# Altium PCB 24.067.PcbDoc
Units mm, origin at the board's own origin, x right, y up, seen from the top; angles counter-clockwise.
Board outline 64 x 52 mm, 2 copper layers (Top Layer, Bottom Layer); 5 components, 16 nets, 53 pads, 0 vias.
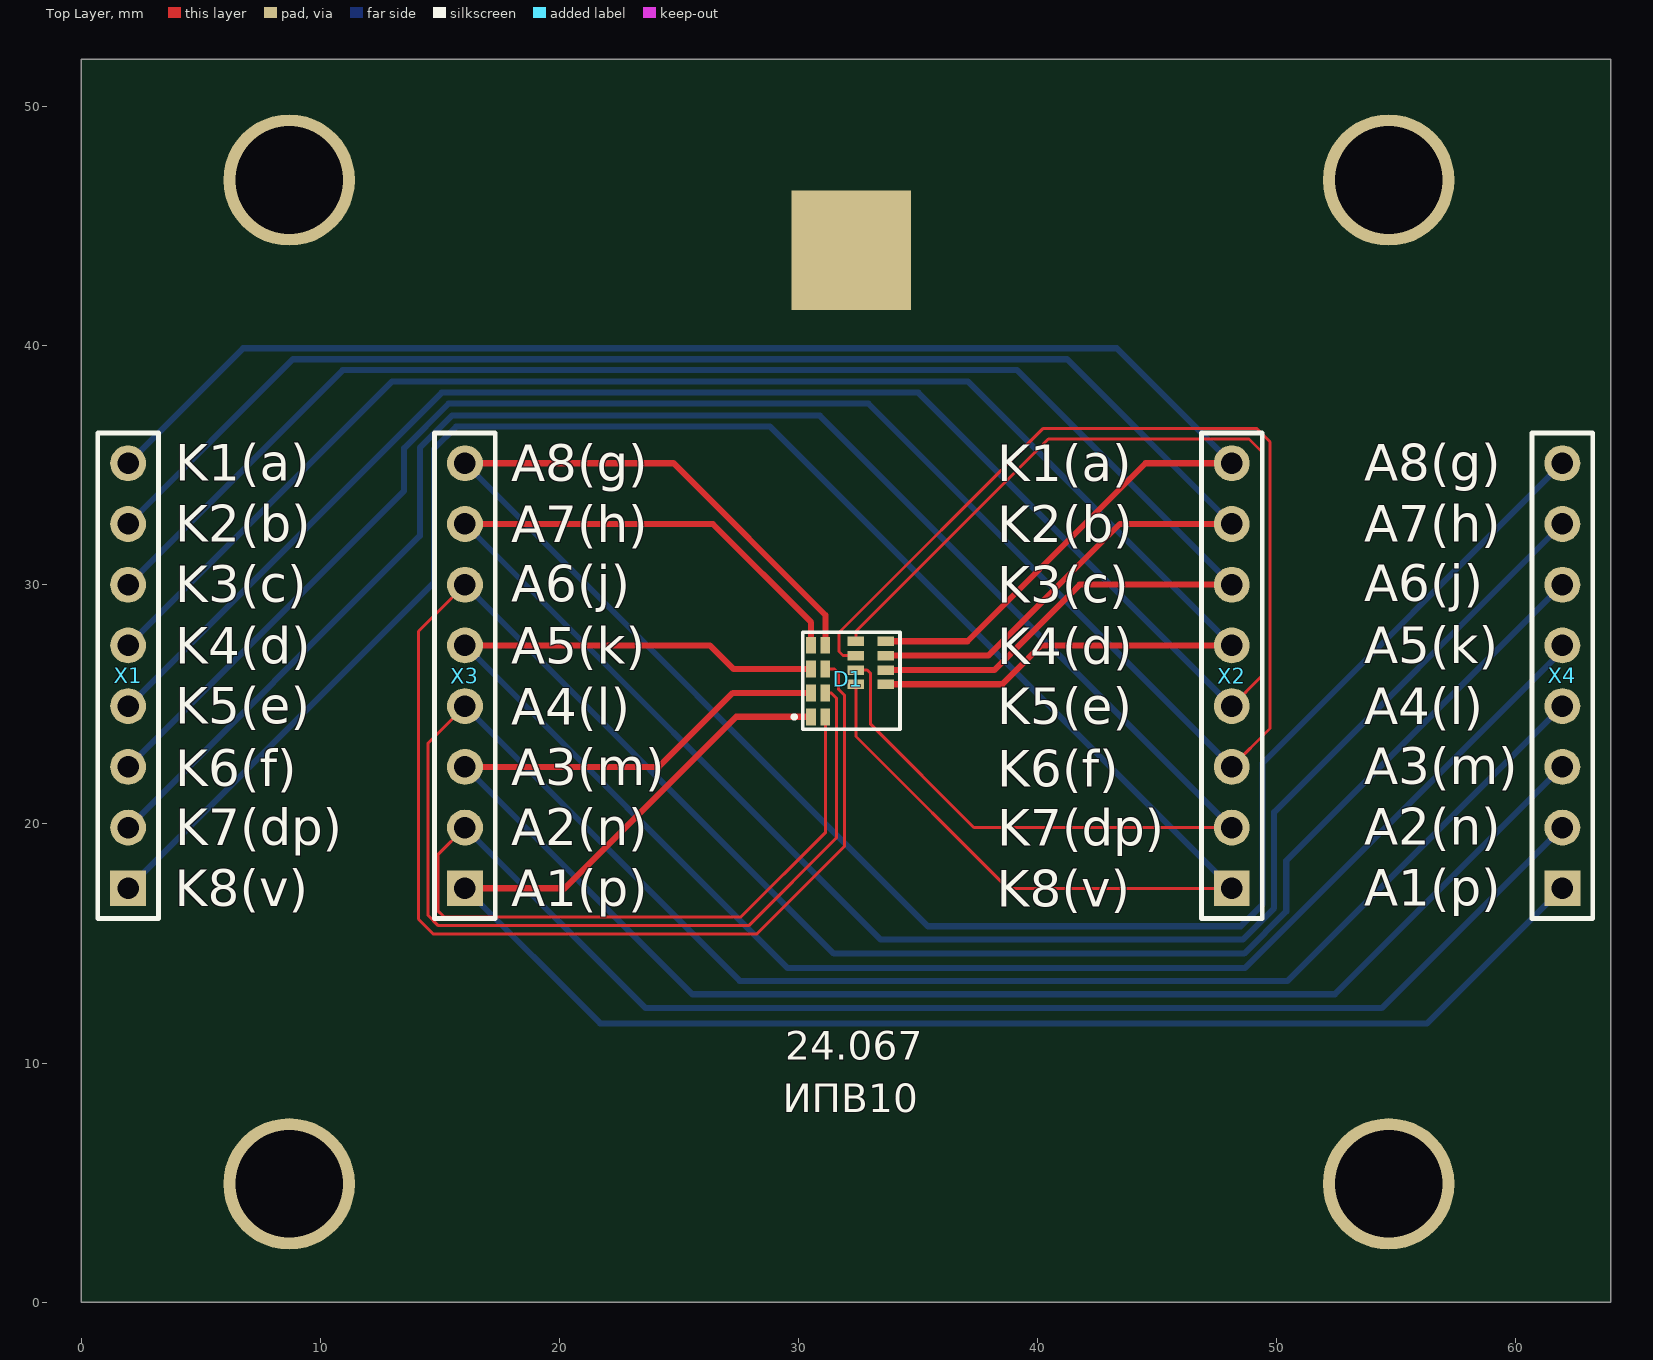
[diagram p0: Top Layer view]
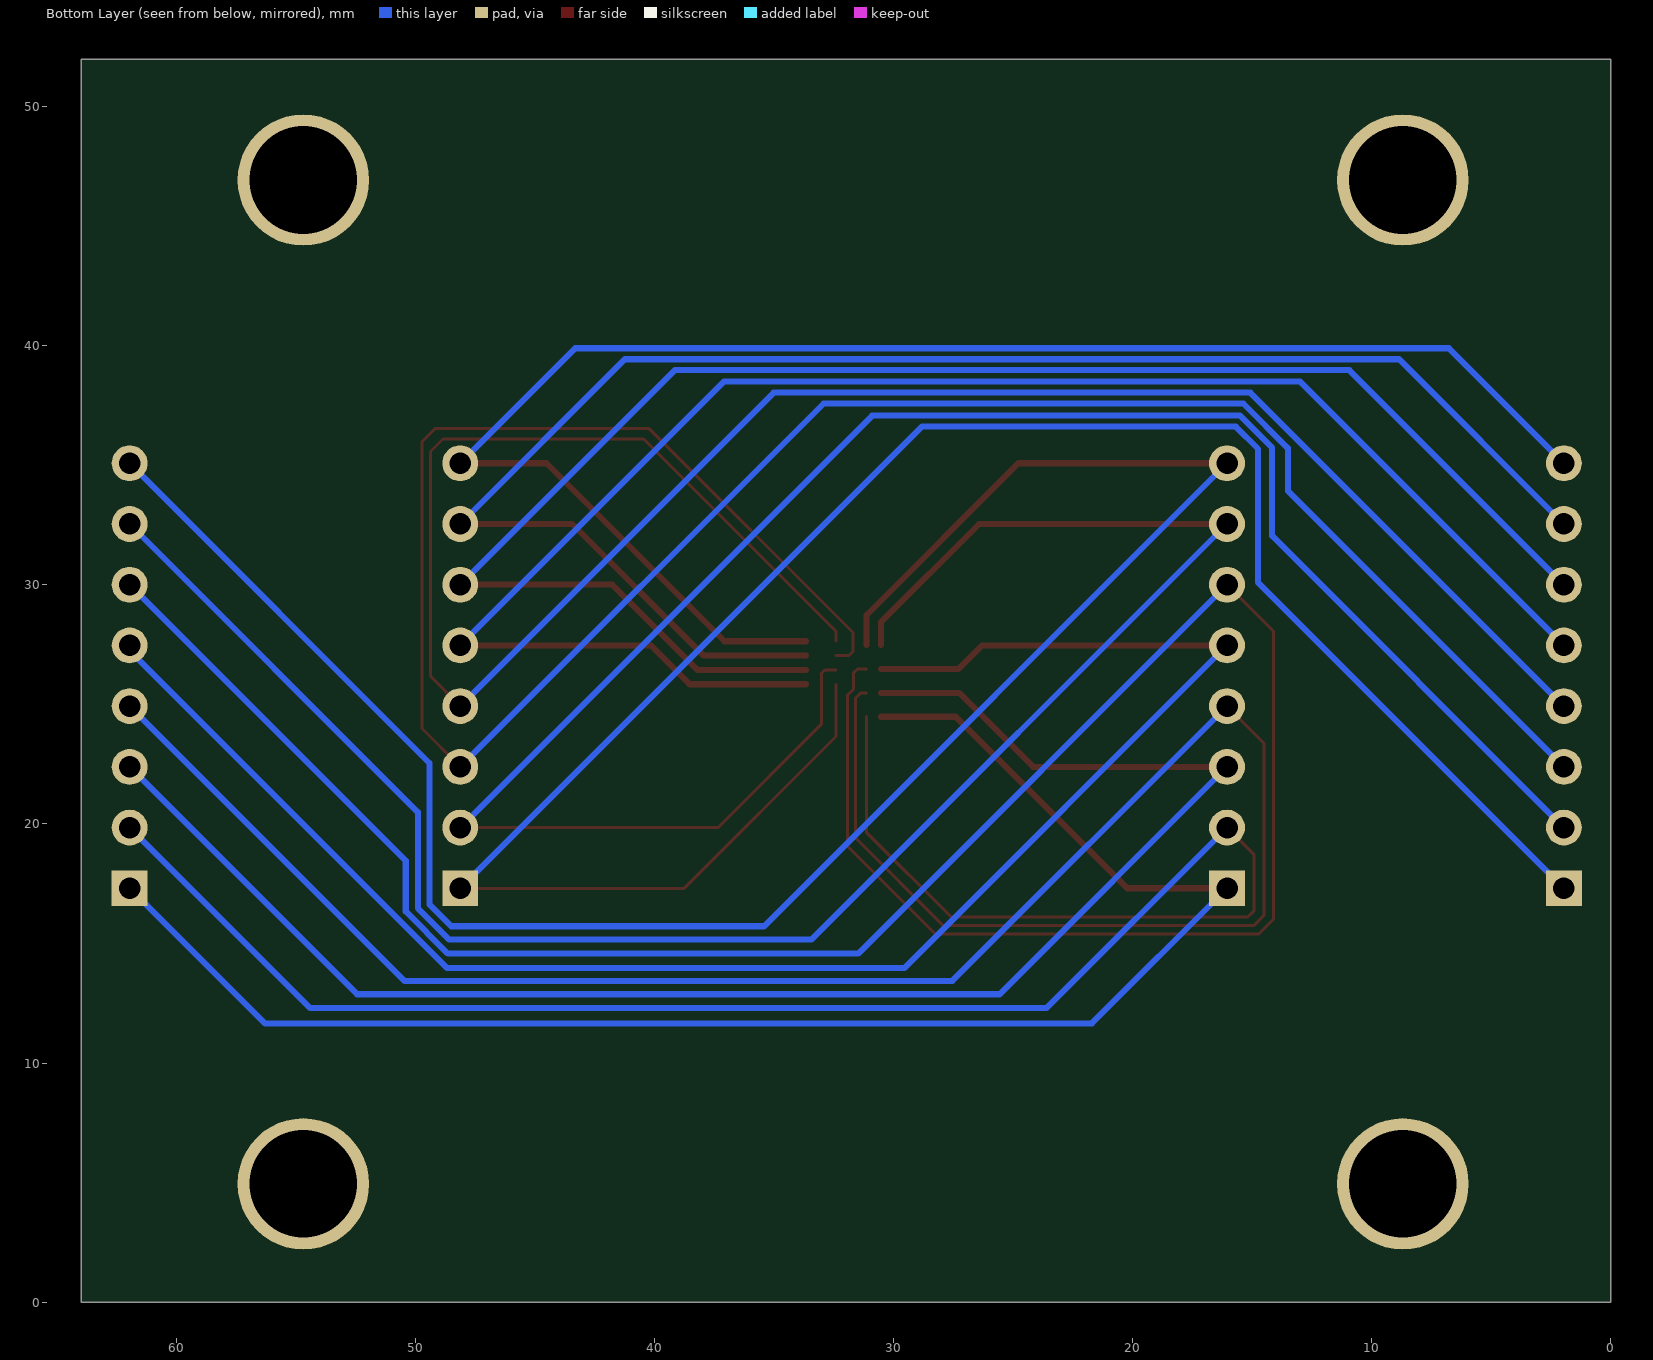
[diagram p1: Bottom Layer view, seen from below]

## Layer stack, top to bottom
Top Solder: solder mask 0.0102, Solder Resist, Dk 3.5
Top Layer: signal copper 0.0356
Dielectric 1: dielectric 0.32, FR-4, Dk 4.8
Bottom Layer: signal copper 0.0356
Bottom Solder: solder mask 0.0102, Solder Resist, Dk 3.5

## Board outline
64,0 64,52 0,52 0,0

## Design rules (kind name [scope] priority, off if disabled: settings)
Clearance [All] p1: gap=0.254 ignorepadtopadclearanceinfootprint=FALSE except(0: Arc-Hole Track-Hole SMDPad-Hole THPad-Hole Via-Hole Fill-Hole Poly-Hole Region-Hole Text-Hole; 0.2: Arc-Arc Arc-Track Arc-SMDPad Arc-THPad Track-Track Track-SMDPad Track-THPad SMDPad-SMDPad SMDPad-THPad THPad-THPad)
PolygonConnect [All] p1: connectstyle=Relief reliefconductorwidth=0.254 reliefentries=4 polygonreliefangle="90 Angle" airgapwidth=0.254
RoutingVias [All] p1: holewidth=0.711 width=1.27 viastyle="Through Hole" minholewidth=0.711 minwidth=1.27 maxholewidth=0.711 maxwidth=1.27
SolderMaskExpansion [All] p1: expansion=0.102
Width [All] p1: maxlimit=0.254 minlimit=0.125 preferedwidth=0.254
30 further rules are at their usual default settings.

## Components (designator, comment, footprint, x,y, rotation, side; value= is the part's Value field where it differs from the comment)
D1 "LED_8x8" LED_8x8 30.535,24.481 r0 top
X1 "Header 8" HDR1X8 1.968,17.311 r90 top
X2 "Header 8" HDR1X8 48.14,17.311 r90 top
X3 "Header 8" HDR1X8 16.06,17.311 r90 top
X4 "Header 8" HDR1X8 61.968,17.311 r90 top

## Footprints (in the part's own frame and the unit in brackets; to place one, negate y for a bottom-side part, rotate by r counter-clockwise, add the part's x,y. Pads: shape width x height; smd on the part's side, far side on the other; paste and mask are expansions set on the pad)
HDR1X8 [mm] "Connector; Header; 8 Position"
  rect 1.5x1.5 hole 0.9: 1(0,0)
  round 1.5 hole 0.9: 2(2.54,0) 3(5.08,0) 4(7.62,0) 5(10.16,0) 6(12.7,0) 7(15.24,0) 8(17.78,0)
  silkscreen extent -1.27,-1.27 19.05,1.27
LED_8x8 [mm] "24.067"
  rect 0.4x0.7 smd: 1(0,0) 2(0.6,0) 3(0,1) 4(0.6,1) 5(0,2) 6(0.6,2) 7(0,3) 8(0.6,3)
  rect 0.7x0.4 smd: 9(3.125,3.159) 10(3.125,2.559) 11(3.125,1.959) 12(3.125,1.359) 13(1.875,3.159) 14(1.875,2.559) 15(1.875,1.959) 16(1.875,1.359)
  silkscreen extent -0.72,-0.52 3.72,3.55

## Part data
X1 X2 X3 X4: "Header, 8-Pin", LatestRevisionDate=17-Jul-2002, LatestRevisionNote="Re-released for DXP Platform.", Publisher="Altium Limited"

## Free pads (board coordinates)
  rect 5x5 smd: 0(32.222,44.007)
  round 5.5 hole 4.5: 1(8.701,4.942) 1(8.701,46.942) 1(54.701,4.942) 1(54.701,46.942)

## Nets (pads, with @x,y where several pads share a name; then routed paths per layer and width w, separated by ;. In a path a pad name is that pad's centre, name@x,y a point inside that pad or via, vN(x,y) a via of type N, cw(c..) or ccw(c..) an arc to the next point about the centre after c; other vN are vias at no path point)
A1: D1.1 X3.1 X4.1 | length 68
  Top Layer w0.254: X3.1 20.233,17.311 27.409,24.487 D1.1@30.543,24.487
  Bottom Layer w0.254: X3.1 21.713,11.659 56.315,11.659 X4.1
A2: D1.2 X3.2 X4.2 | length 78.8
  Top Layer w0.125: X3.2 14.925,18.716 14.925,16.373 15.18,16.118 27.612,16.118 31.148,19.653 D1.2@31.148,24.5
  Bottom Layer w0.254: X3.2 23.618,12.294 54.41,12.294 X4.2
A3: D1.3 X3.3 X4.3 | length 69.6
  Top Layer w0.254: X3.3 24.17,22.391 27.266,25.487 D1.3@30.543,25.487
  Bottom Layer w0.254: X3.3 25.574,12.878 52.454,12.878 X4.3
A4: D1.4 X3.4 X4.4 | length 90
  Top Layer w0.125: X3.4 14.518,23.39 14.518,16.169 14.926,15.762 27.947,15.762 31.605,19.42 31.605,25.261 31.376,25.49 D1.4@31.148,25.49
  Bottom Layer w0.254: X3.4 27.555,13.437 50.473,13.437 X4.4
A5: D1.5 X3.5 X4.5 | length 72.1
  Top Layer w0.254: X3.5 26.307,27.471 27.292,26.487 D1.5@30.543,26.487
  Bottom Layer w0.254: X3.5 29.561,13.97 48.687,13.97 61.968,27.251 X4.5
A6: D1.6 X3.6 X4.6 | length 102.3
  Top Layer w0.125: X3.6 14.112,28.063 14.112,16.017 14.723,15.406 28.277,15.406 31.935,19.064 31.935,25.391 31.681,25.645 31.681,26.328 31.523,26.487 D1.6@31.143,26.487
  Bottom Layer w0.254: X3.6 31.492,14.58 48.655,14.58 50.419,16.344 50.419,18.463 X4.6
A7: D1.7 X3.7 X4.7 | length 79.8
  Top Layer w0.254: X3.7 26.427,32.551 30.543,28.436 D1.7@30.543,27.487
  Bottom Layer w0.254: X3.7 33.448,15.164 48.597,15.164 49.911,16.478 49.911,20.495 X4.7
A8: D1.8 X3.8 X4.8 | length 84.4
  Top Layer w0.254: X3.8 24.787,35.091 31.143,28.736 D1.8@31.143,27.487
  Bottom Layer w0.254: X3.8 35.429,15.723 48.514,15.723 49.428,16.637 49.428,22.552 X4.8
K1: D1.9 X1.8 X2.8 | length 67.9
  Top Layer w0.254: D1.9@33.668,27.646 37.083,27.646 44.529,35.091 X2.8 X2.8@48.361,35.091
  Bottom Layer w0.254: X1.8 6.78,39.903 43.328,39.903 X2.8
K2: D1.10 X1.7 X2.7 | length 68.6
  Top Layer w0.254: D1.10@33.668,27.046 37.951,27.046 43.456,32.551 X2.7
  Bottom Layer w0.254: X1.7 8.859,39.443 41.249,39.443 X2.7
K3: D1.11 X1.6 X2.6 | length 69.6
  Top Layer w0.254: D1.11@33.668,26.446 38.214,26.446 41.78,30.011 X2.6
  Bottom Layer w0.254: X1.6 10.945,38.989 39.163,38.989 X2.6
K4: D1.12 X1.5 X2.5 | length 70.5
  Top Layer w0.254: D1.12@33.668,25.846 38.539,25.846 40.165,27.471 X2.5
  Bottom Layer w0.254: X1.5 13.003,38.506 37.105,38.506 X2.5
K5: D1.13 X1.4 X2.4 | length 89.1
  Top Layer w0.125: D1.13@32.418,27.646 32.418,28.06 40.465,36.107 48.859,36.107 49.387,35.58 49.387,26.178 X2.4
  Bottom Layer w0.254: X1.4 15.085,38.049 35.022,38.049 X2.4
K6: D1.14 X1.3 X2.3 | length 97.4
  Top Layer w0.125: D1.14@32.418,27.046 31.878,27.046 31.706,27.217 31.706,28.009 40.236,36.539 49.19,36.539 49.743,35.987 49.743,23.994 X2.3
  Bottom Layer w0.254: X1.3 13.513,33.937 13.513,35.727 15.377,37.592 32.94,37.592 X2.3
K7: D1.15 X1.2 X2.2 | length 82.3
  Top Layer w0.125: D1.15@32.418,26.446 32.884,26.446 33.03,26.3 33.03,24.169 37.348,19.851 X2.2
  Bottom Layer w0.254: X1.2 14.173,32.057 14.173,35.746 15.511,37.084 30.908,37.084 X2.2
K8: D1.16 X1.1 X2.1 | length 86
  Top Layer w0.125: D1.16@32.418,25.846 32.418,23.661 38.768,17.311 X2.1
  Bottom Layer w0.254: X1.1 14.757,30.101 14.757,35.688 15.696,36.627 28.825,36.627 X2.1

## Silkscreen, mask and mechanical layers (free items; w line width, h text height)
Top Overlay:
  text "K1(a)" at 3.94,34.355 h1.52
  text "A8(g)" at 53.686,34.355 h1.52
  text "A8(g)" at 17.999,34.329 h1.52
  text "K1(a)" at 38.332,34.329 h1.52
  text "K2(b)" at 3.94,31.815 h1.52
  text "A7(h)" at 53.686,31.815 h1.52
  text "A7(h)" at 17.999,31.789 h1.52
  text "K2(b)" at 38.332,31.789 h1.52
  text "A6(j)" at 53.686,29.326 h1.52
  text "A6(j)" at 17.999,29.3 h1.52
  text "K3(c)" at 3.94,29.275 h1.52
  text "K3(c)" at 38.332,29.249 h1.52
  text "A5(k)" at 53.686,26.735 h1.52
  text "K4(d)" at 3.94,26.709 h1.52
  text "A5(k)" at 17.999,26.709 h1.52
  text "K4(d)" at 38.332,26.684 h1.52
  text "K5(e)" at 3.94,24.195 h1.52
  text "K5(e)" at 38.332,24.169 h1.52
  text "A4(l)" at 53.686,24.169 h1.52
  text "A4(l)" at 17.999,24.144 h1.52
  text "A3(m)" at 53.686,21.655 h1.52
  text "A3(m)" at 17.999,21.629 h1.52
  text "K6(f)" at 3.94,21.579 h1.52
  text "K6(f)" at 38.332,21.553 h1.52
  text "A2(n)" at 53.686,19.14 h1.52
  text "K7(dp)" at 3.94,19.115 h1.52
  text "A2(n)" at 17.999,19.115 h1.52
  text "K7(dp)" at 38.332,19.089 h1.52
  text "A1(p)" at 53.686,16.575 h1.52
  text "K8(v)" at 3.921,16.556 h1.52
  text "A1(p)" at 17.999,16.549 h1.52
  text "K8(v)" at 38.313,16.531 h1.52
  text "24.067" at 29.453,9.748 h2.03
  text "ИПВ10" at 29.353,7.548 h2.03
Mechanical 1:
  the board outline again, w0.254